# Allegro board E1_BRD_VILLARREAL_HERNANDEZ_707560.brd
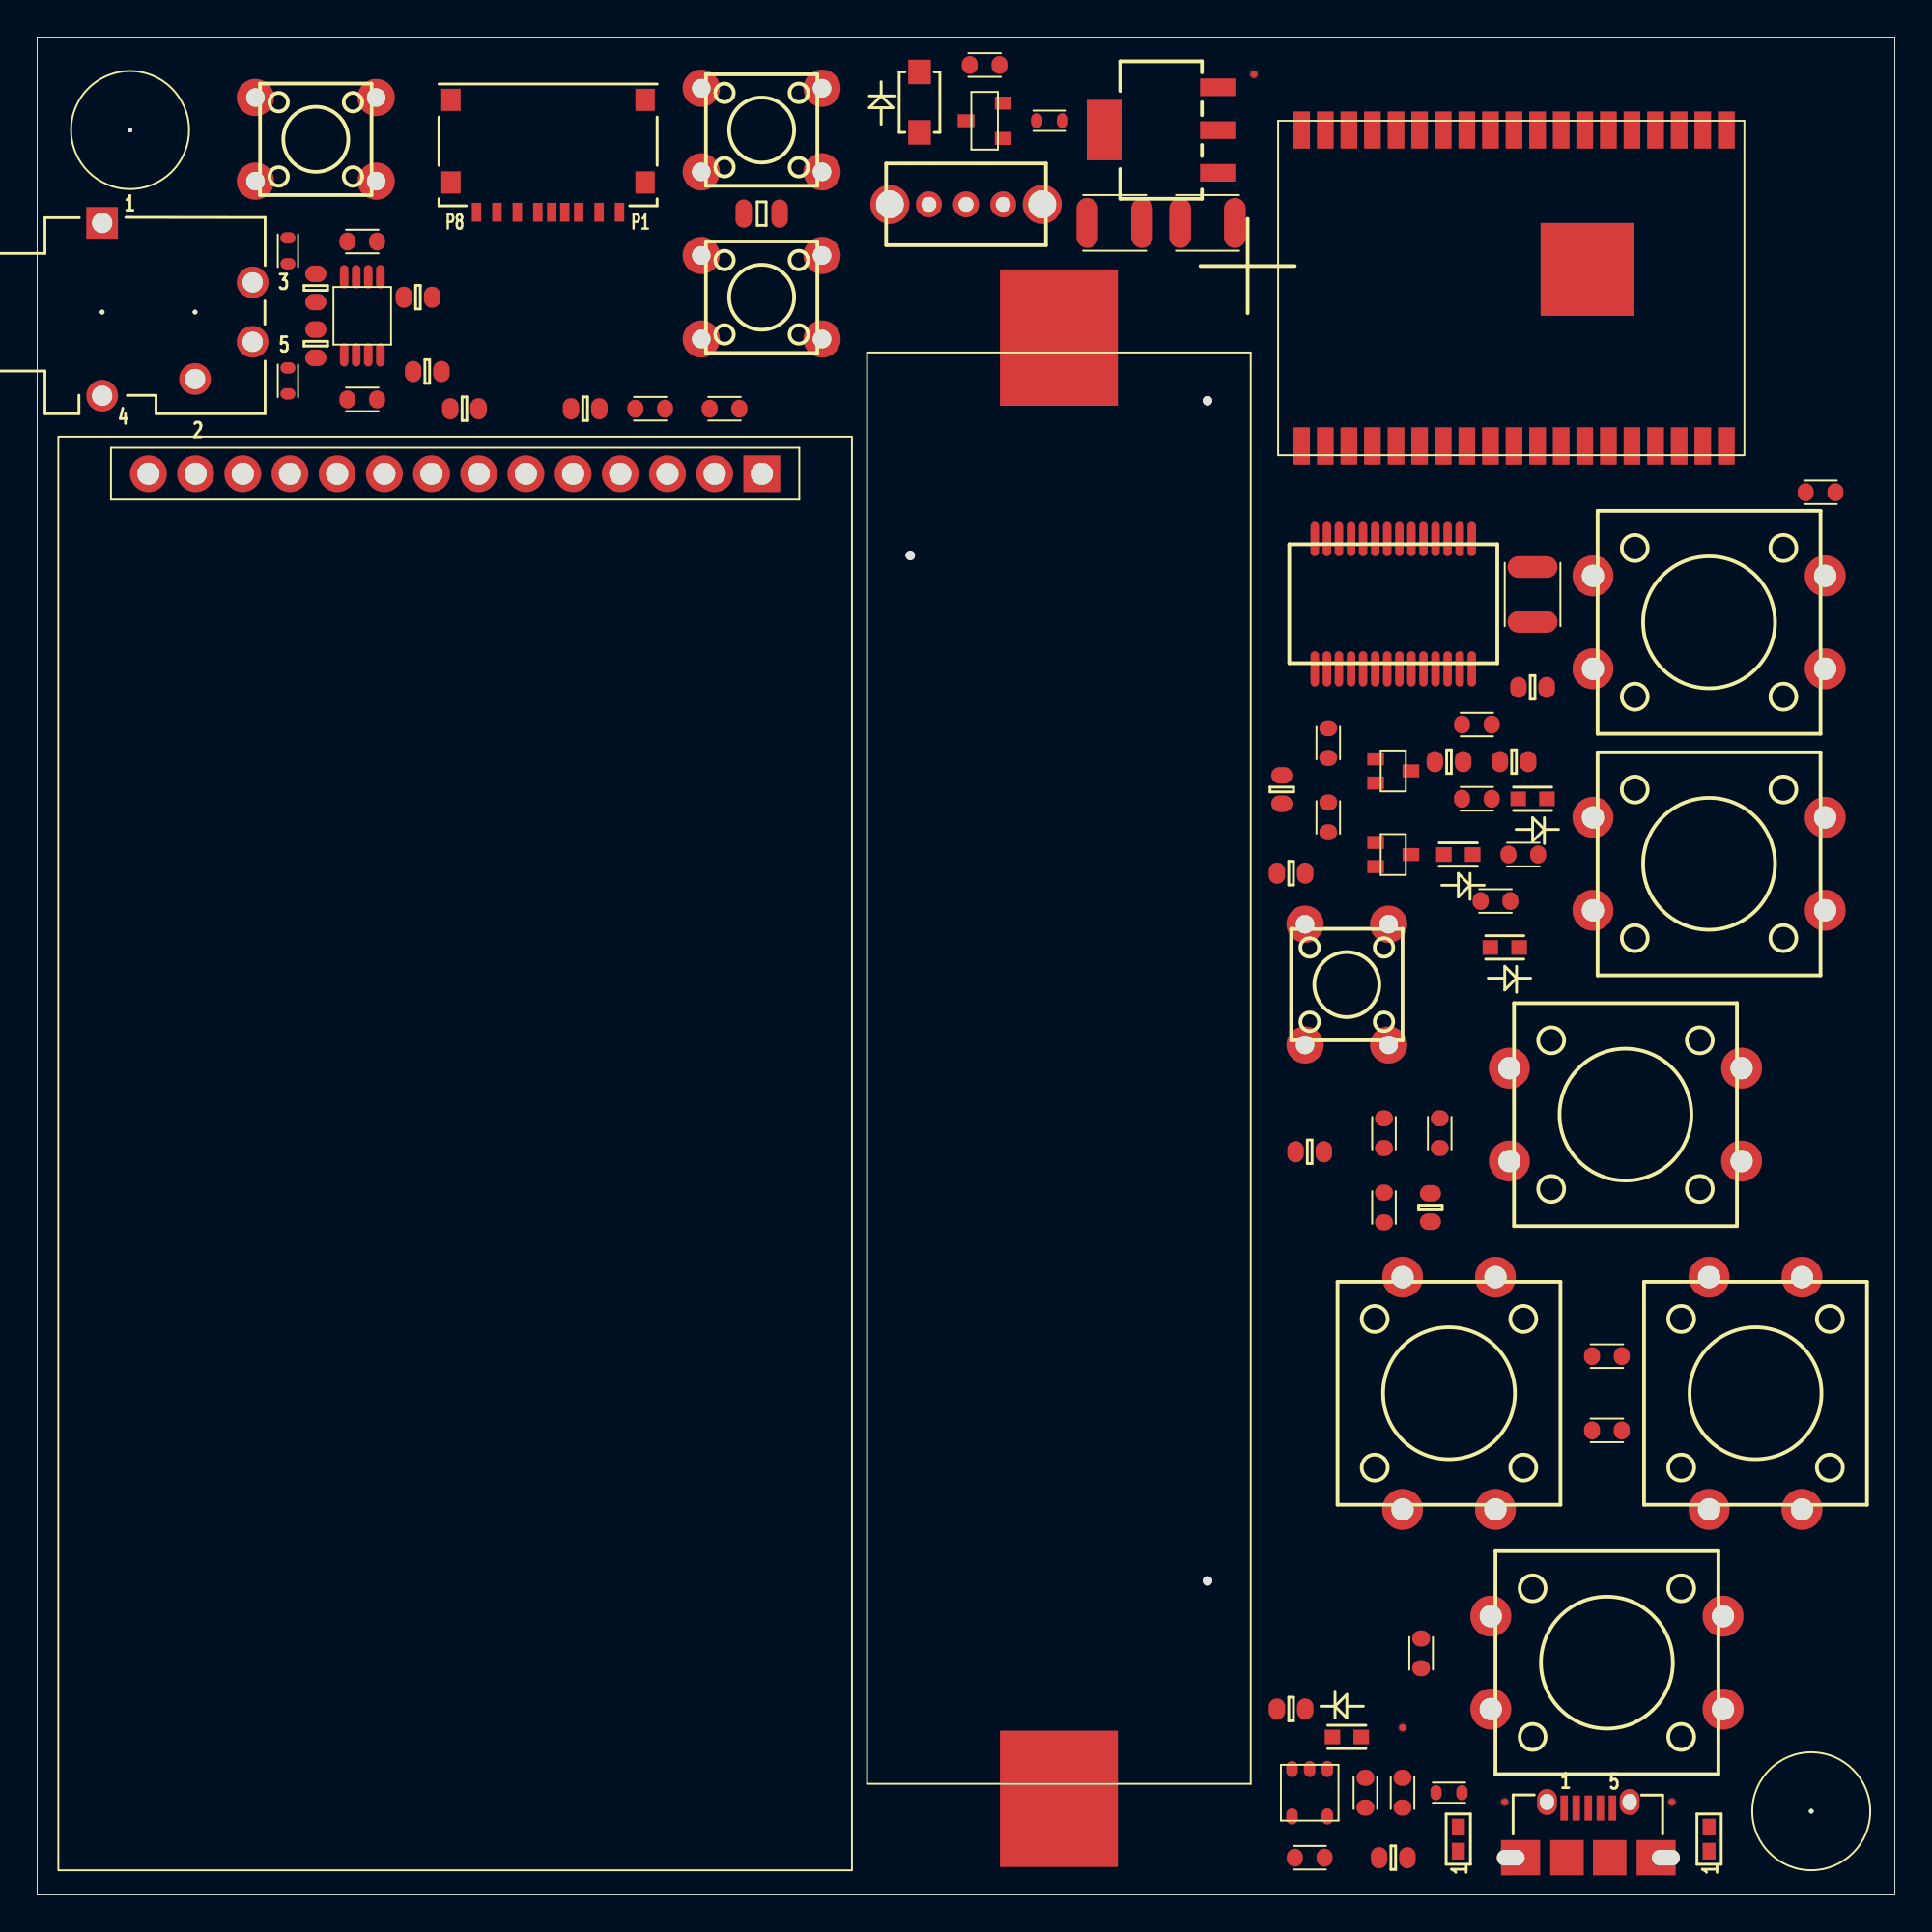
[diagram p0: board, top side]
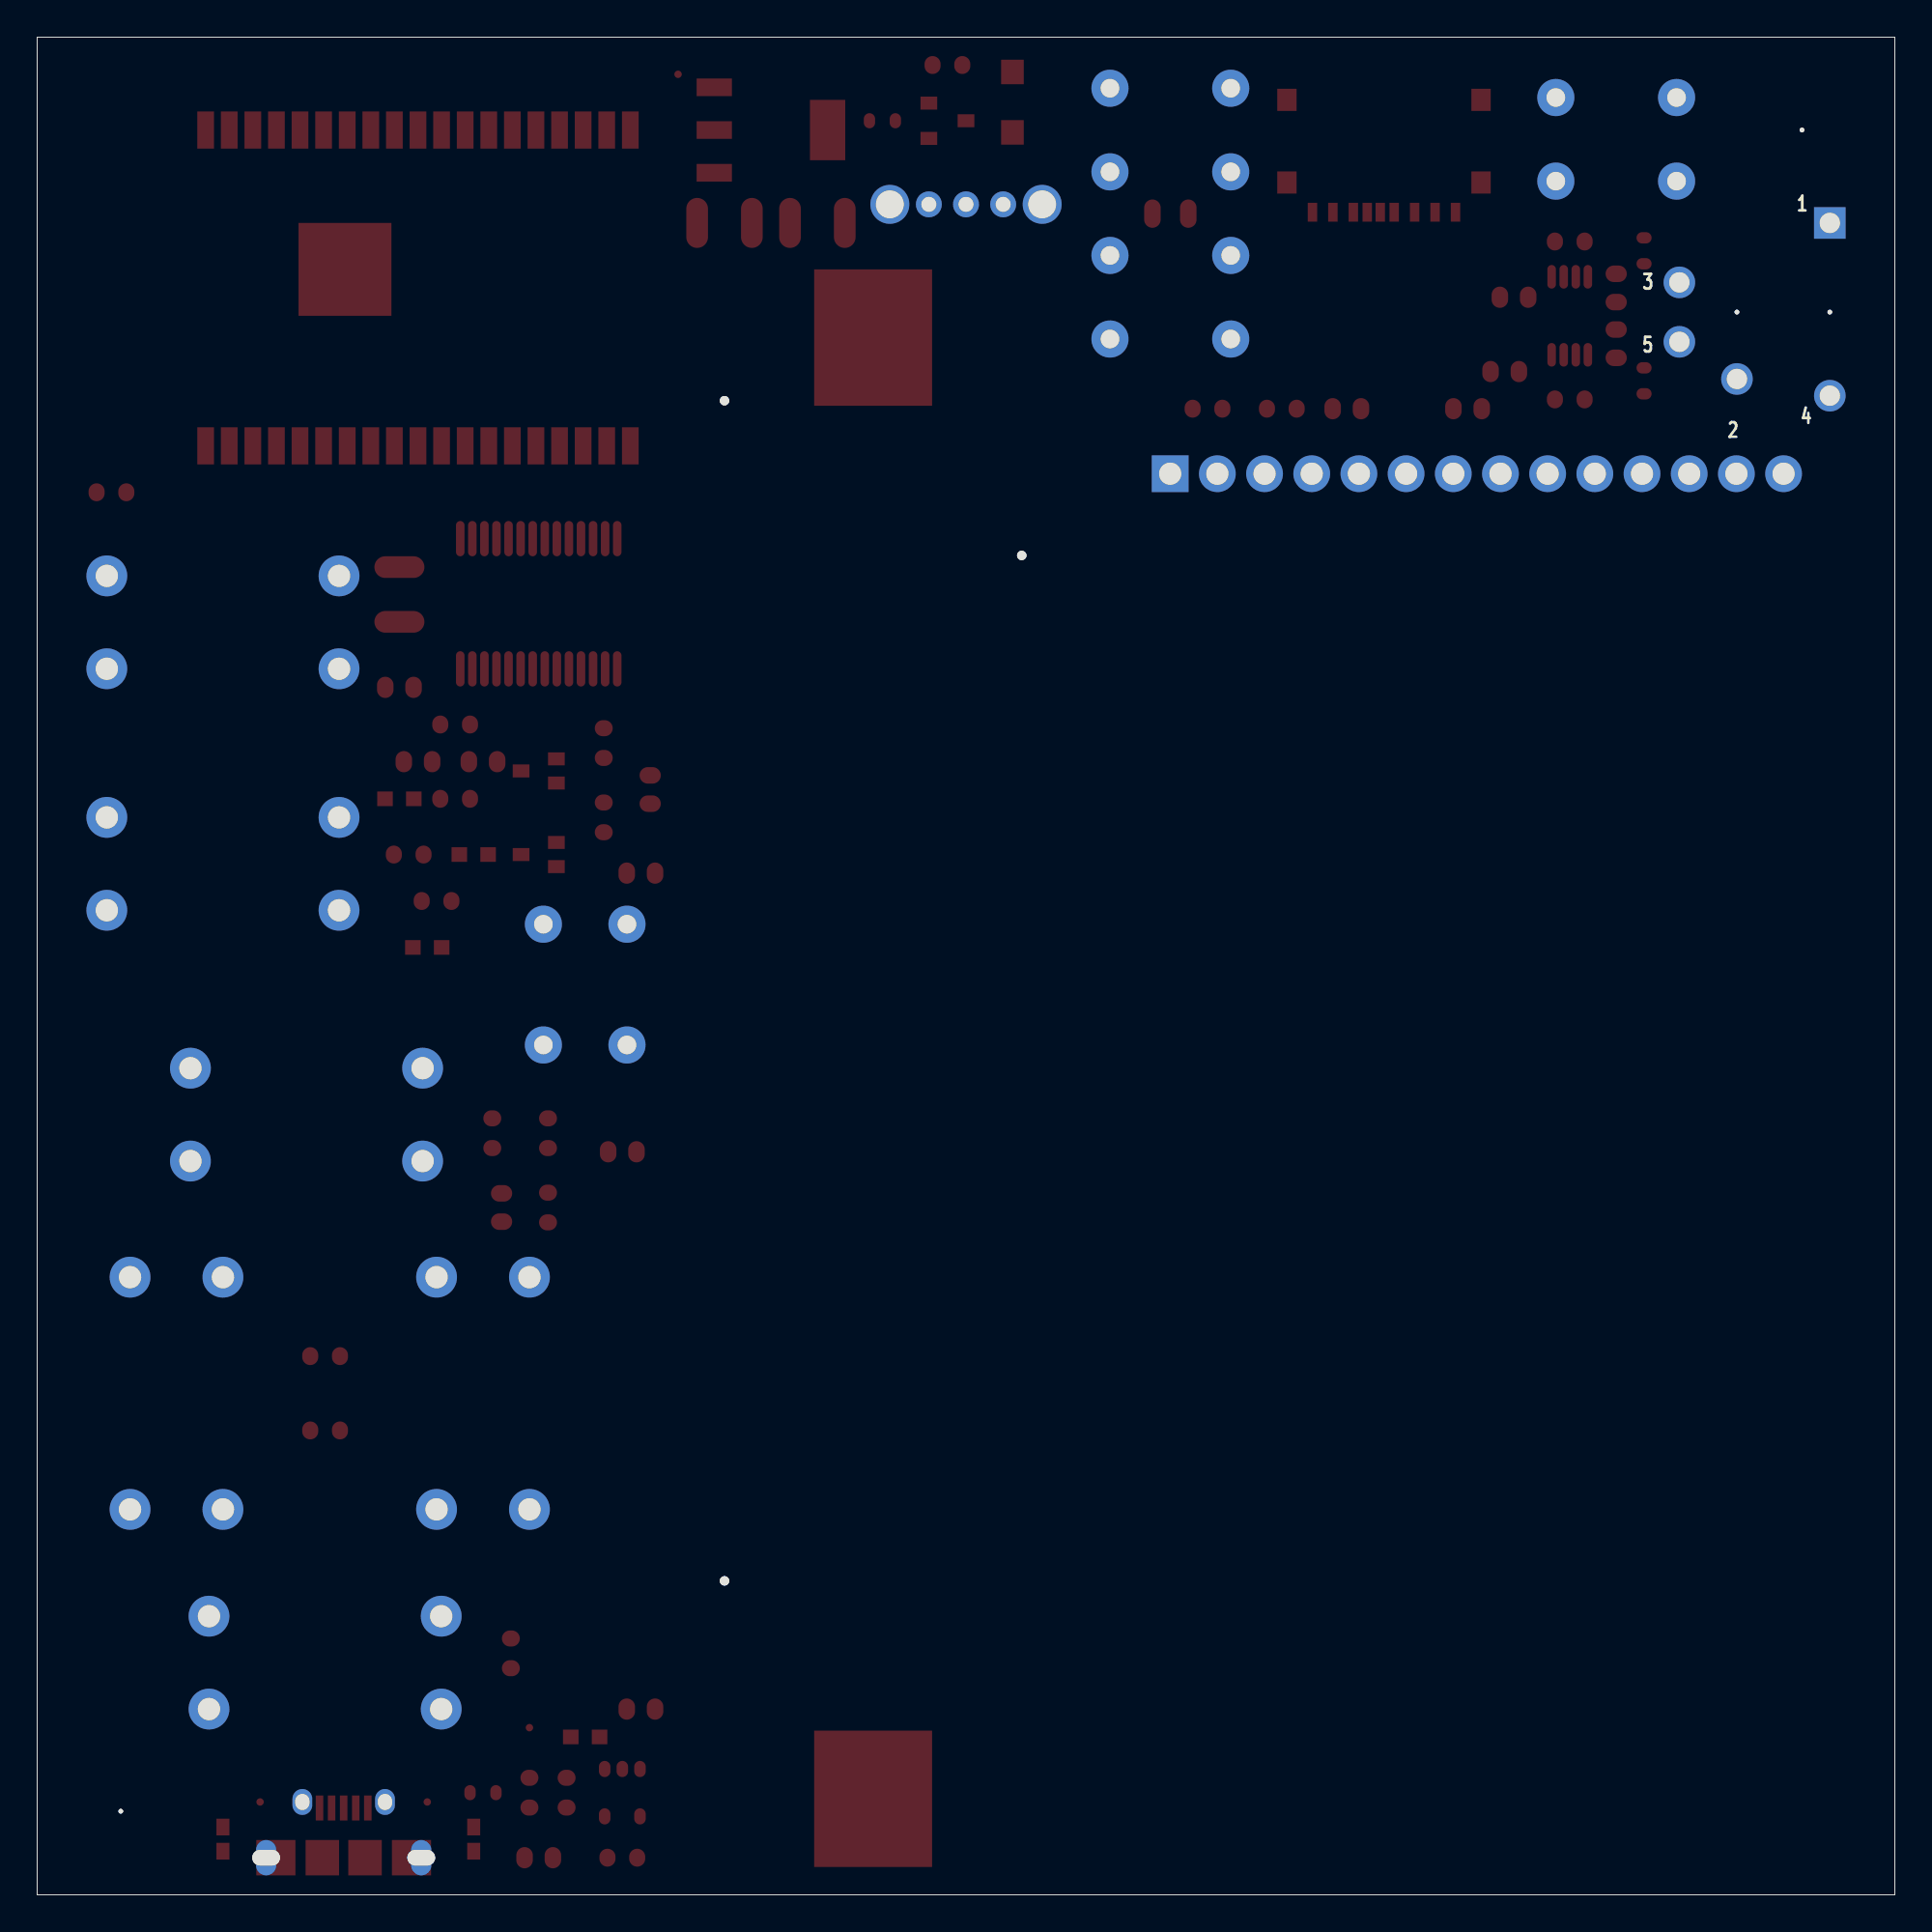
[diagram p1: board, bottom side, seen from below]

Outline 100 x 100 mm; copper layers: TOP, LAYER2, LAYER3, BOTTOM. Coordinates in mm from the lower left corner of the outline.
Outline path: 0,100 0,0 100,0 100,100 0,100

## Design rules (mm)
net group GND: nets GND GND_SHLD
net group USB_D: nets USB_DN USB_DP
net group EC_AUDIO: nets AUDIO_IN+ AUDIO_IN+_R AUDIO_IN- AUDIO_IN-_R AUDIO_OUT+ AUDIO_OUT+_L AUDIO_OUT- AUDIO_OUT-_L
net group EC_MISC: nets CBUS0 CBUS0_LED CBUS1 CBUS1_LED CHG_VIN FT232_RST IO0 IO2 IO4 IO12 IO13 IO14 IO15 IO21 IO25 IO26 IO27 IO32 IO33 IO34 IO34_R IO35 IO35_R IO36 IO39 ISEN_CHRGR LED_VIN RESET STATUS_LED
net group EC_UART: nets DTR_N DTR_N_R RTS_N RTS_N_R UART_RXD UART_TXD
net group MG_SPI: nets SPI_CS0 SPI_CS1 SPI_MISO SPI_MOSI SPI_SCK
net group PWR: nets FT232_P3V3OUT P3V3 P3V7_VBAT P5V0_P3V7 P5V0_P3V7_IN P5V0_P3V7_L P5V0_USB

## Placement (name value [footprint] x y rotation side)
C1  0.1uF  [CC0603_OV]  75 37 90 top
C2  0.1uF  [CC0603_OV]  73 2 0 top
C3  47uF  [CC1210_OV]  58 90 180 top
C4  47uF  [CC1210_OV]  63 90 0 top
C5  4.7uF  [CC0603_OV]  67.5 10 0 top
C6  22uF  [CC1210_OV]  80.5 70 90 top
C7  0.1uF  [CC0603_OV]  80.5 65 0 top
C8  0.1uF  [CC0603_OV]  68.5 40 0 top
C9  0.1uF  [CC0603_OV]  76 61 180 top
C11  4.7uF  [CC0603_OV]  67 59.5 90 top
C12  0.1uF  [CC0603_OV]  79.5 61 0 top
C13  0.1uF  [CC0603_OV]  67.5 55 0 top
C15  10uF  [CC0805_OV]  39 90.5 0 top
C16  0.1uF  [CC0603_OV]  29.5 80 0 top
C18  0.1uF  [CC0603_OV]  21 82 0 top
C19  0.1uF  [CC0603_OV]  20.5 86 0 top
C20  220pF  [CC0603_OV]  15 86.5 90 top
C21  220pF  [CC0603_OV]  15 83.5 270 top
C22  1uF  [CC0603_OV]  23 80 0 top
D1  598-8060-107F  [LED_0603]  70.5 8.5 180 top
D2  MBR120VLSFT1G  [SOD-123]  47.5 96.5 90 top
D3  0402ESDA-MLP1  [0402_MLP]  90 3 90 top
D4  0402ESDA-MLP1  [0402_MLP]  76.5 3 90 top
D5  QTLP603CEBTR  [LED_0603]  80.5 59 0 top
D6  598-8060-107F  [LED_0603]  76.5 56 0 top
D7  598-8060-107F  [LED_0603]  79 51 0 top
J1  47589-0001  [CON5_MICROUSB]  83.5 2 0 top
J2  SJ-43515TS  [CON5_AUD_JACK_RA_TH_SJ-43515TS]  3.5 90 0 top
J4  2.4" 240x320 SPI TFT ILI9341  [TFT_2P4_INCH_14PIN]  22.5 76.5 270 top
J5  1050270001  [CON8_SDCARD_PUSH_SM]  27.5 94.5 0 top
J6  1042P  [1042P_BAT_HLDR]  55 44.5 90 top
L1  330  [L0603_OV]  54.5 95.5 0 top
L2  330  [L0603_OV]  76 5.5 0 top
L3  330  [L0603_OV]  13.5 88.5 90 top
L4  330  [L0603_OV]  13.5 81.5 270 top
NOREF  -  [unnamed]  5 95 0 top
NOREF#2  -  [unnamed]  95.5 4.5 0 top
Q1  SSF1341  [SOT23-3]  51 95.5 180 top
Q2  MMBT3904WT1G  [SOT323]  73 60.5 0 top
Q3  MMBT3904WT1G  [SOT323]  73 56 0 top
R1  200K  [R0603_OV]  68.5 2 0 top
R2  2K  [R0603_OV]  71.5 5.5 90 top
R3  100K  [R0603_OV]  73.5 5.5 90 top
R4  100K  [R0603_OV]  72.5 41 90 top
R5  100K  [R0603_OV]  72.5 37 90 top
R6  100K  [R0603_OV]  51 98.5 180 top
R7  10K  [R0603_OV]  33 80 0 top
R8  10K  [R0603_OV]  69.5 62 270 top
R9  10K  [R0603_OV]  69.5 58 90 top
R10  2K  [R0603_OV]  77.5 59 0 top
R12  470R  [R0603_OV]  80 56 0 top
R13  470R  [R0603_OV]  78.5 53.5 0 top
R14  10K  [R0603_OV]  77.5 63 0 top
R15  100K  [R0603_OV]  17.5 89 180 top
R16  100K  [R0603_OV]  17.5 80.5 180 top
R17  10K  [R0603_OV]  84.5 29 180 top
R18  10K  [R0603_OV]  84.5 25 180 top
R19  10K  [R0603_OV]  74.5 13 270 top
R20  10K  [R0603_OV]  75.5 41 90 top
R21  10K  [R0603_OV]  37 80 0 top
R22  10K  [R0603_OV]  96 75.5 0 top
SW1  OS102011MA1QN1  [SLIDE_SWITCH]  50 91 270 top
SW2  DTS-21N-V  [SWITCH_12X12]  76 27 90 top
SW3  DTS-21N-V  [SWITCH_12X12]  92.5 27 90 top
SW4  DTS-21N-V  [SWITCH_12X12]  84.5 12.5 0 top
SW5  DTS-21N-V  [SWITCH_12X12]  85.5 42 0 top
SW6  PTS645SH432LFS  [SWITCH_6X6]  39 95 0 top
SW7  PTS645SH432LFS  [SWITCH_6X6]  70.5 49 270 top
SW8  PTS645SH432LFS  [SWITCH_6X6]  15 94.5 0 top
SW9  PTS645SH432LFS  [SWITCH_6X6]  39 86 180 top
SW10  DTS-21N-V  [SWITCH_12X12]  90 55.5 0 top
SW11  DTS-21N-V  [SWITCH_12X12]  90 68.5 0 top
TP1  TestPoint 40  [TP]  88 5 0 top
TP2  TestPoint 40  [TP]  79 5 0 top
TP5  TestPoint 40  [TP]  73.5 9 0 top
TP6  TestPoint 40  [TP]  65.5 98 0 top
U4  FT232R  [SSOP28]  73 69.5 270 top
U6  XC6802A42XMR-G  [SOT23-5]  68.5 5.5 270 top
U7  MCP1825ST-3302E/DB  [SOT223-4A]  60.5 95 180 top
U8  ESP32-WROVER-B (16Mb)  [LCC39_WROVERB]  79.5 86.5 270 top
U9  PAM8304ASR  [MSOP8]  17.5 85 270 top

## Library data of the parts
C1 C2 C7-C9 C12 C13 C16 C18 C19 = CAP SMD 0.1uF 16V 10% X7R 0603
C3 C4 = CAP SMD 47uF 16V 20% X5R 1210
C5 C11 = CAP SMD 4.7uF 16V 10% X7S 0603
C6 = CAP SMD 22uF 16V 10% X7R 1210
C15 = CAP SMD 10uF 10V X7R 0805
C20 C21 = CAP SMD 220pF 50V 10% X7R 0603
C22 = CAP SMD 1uF 25V 10% X7R 0603
D1 D6 D7 = LED SMD YLW/GRN 0603
D2 = DIODE MBR120VLSFT1G SOD123
D3 D4 = DIODE TVS BIDIR 0402
D5 = LED SMD BLUE 0603
J1 = CONN Micro USB Type AB
J2 = Audio Jack 3.5mm SJ-43515TS
J4 = TFT 2.4" Wrisky0895
J5 = CON8_SDCARD_SW_0
J6 = 1042P_BATTERY_HOLDER
L1-L4 = IND FER-BEAD 330 1.7A 0603
Q1 = TRANS P-CH 12V 3_3.5A SOT23
Q2 Q3 = TRANS BJT NPN 40V 0_0.2A SOT323
R1 = RES SMD 200K 5% 0_1.1W 0603
R2 R10 = RES SMD 2K 5% 0_0.1W 0603
R3-R6 R15 R16 = RES SMD 100K 5% 0_1.1W 0603
R7-R9 R14 R17-R22 = RES SMD 10K 5% 0_1.25W 0603
R12 R13 = RES SMD 470R 5% 0_0.1W 0603
SW1 = SW OS102011MA1QN1
SW2-SW5 SW10 SW11 = PUSHBUTTON_DTS-21N-V_12X12
SW6-SW9 = PUSHBUTTON_PTS645SH432LFS_6x6
TP1 TP2 TP5 TP6 = TestPoint 40_0
U4 = TMP_0
U6 = XC6802A42XMR-G_0
U7 = MCP1825S
U8 = ESP32_WROVER-B_2
U9 = PAM8304ASR

## Footprints (pads in the part's own frame, mm; a bottom-side part is the same pattern mirrored in y, then rotated)
0402_MLP
  rect 0.9x0.7 smd: 1(-0.65,0) 2(0.65,0)
1042P_BAT_HLDR
  round 0.5 hole 3.45: (-27.6,-8) (27.6,8)
  round 0.5 hole 3: (35.93,-8)
  rect 7.34x6.35 smd: 1(-39.33,0) 2(39.33,0)
CC0603_OV
  oval 0.889x1.143 smd: 1(-0.762,0) 2(0.762,0)
CC0805_OV
  oval 0.889x1.524 smd: 1(-0.965,0) 2(0.965,0)
CC1210_OV
  oval 1.168x2.692 smd: 1(-1.473,0) 2(1.473,0)
CON5_AUD_JACK_RA_TH_SJ-43515TS
  round 0.254 hole 1.092 unplated: (0,-4.8) (5,-4.8)
  rect 1.702x1.702 hole 1.092: 1(0,0)
  round 1.702 hole 1.092: 2(5,-8.4) 3(8.1,-3.2) 4(0,-9.3) 5(8.1,-6.4)
CON5_MICROUSB
  rect 1.803x1.905 smd: (-1.15,0) (1.15,0)
  rect 0.406x1.346 smd: 1(-1.3,2.675) 2(-0.65,2.675) 3(0,2.675) 4(0.65,2.675) 5(1.3,2.675)
  oval 1.067x1.397 hole 0.762x0.864: S1(-2.225,3) S2(2.225,3)
  rect 2.108x1.905 hole 1.499x0.838: S3(-4.175,0) S4(4.175,0)
CON8_SDCARD_PUSH_SM
  rect 0.508x1.016 smd: G1(0.2,-3.925) P1(3.85,-3.925) P2(2.75,-3.925) P3(1.65,-3.925) P4(0.9,-3.925) P5(-0.55,-3.925) P6(-1.65,-3.925) P7(-2.75,-3.925) P8(-3.85,-3.925)
  rect 1.041x1.194 smd: S1(5.225,-2.325) S2(5.225,2.125) S3(-5.225,2.125) S4(-5.225,-2.325)
L0603_OV
  oval 0.61x0.813 smd: 1(-0.698,0) 2(0.698,0)
LCC39_WROVERB
  rect 2x0.9 smd: 1(-8.5,11.43) 2(-8.5,10.16) 3(-8.5,8.89) 4(-8.5,7.62) 5(-8.5,6.35) 6(-8.5,5.08) 7(-8.5,3.81) 8(-8.5,2.54) 9(-8.5,1.27) 10(-8.5,0) 11(-8.5,-1.27) 12(-8.5,-2.54) 13(-8.5,-3.81) 14(-8.5,-5.08) 15(-8.5,-6.35) 16(-8.5,-7.62) 17(-8.5,-8.89) 18(-8.5,-10.16) 19(-8.5,-11.43) 20(8.5,-11.43) 21(8.5,-10.16) 22(8.5,-8.89) 23(8.5,-7.62) 24(8.5,-6.35) 25(8.5,-5.08) 26(8.5,-3.81) 27(8.5,-2.54) 28(8.5,-1.27) 29(8.5,0) 30(8.5,1.27) 31(8.5,2.54) 32(8.5,3.81) 33(8.5,5.08) 34(8.5,6.35) 35(8.5,7.62) 36(8.5,8.89) 37(8.5,10.16) 38(8.5,11.43)
  rect 5x5 smd: 39(-1,3.93)
LED_0603
  rect 0.838x0.787 smd: A(-0.775,0) C(0.775,0)
MSOP8
  oval 1.27x0.46 smd: 1(-2.1,0.975) 2(-2.1,0.325) 3(-2.1,-0.325) 4(-2.1,-0.975) 5(2.1,-0.975) 6(2.1,-0.325) 7(2.1,0.325) 8(2.1,0.975)
R0603_OV
  oval 0.864x0.965 smd: 1(-0.8,0) 2(0.8,0)
SLIDE_SWITCH
  round 1.4 hole 0.8: 1(0,2) 2(0,0) 3(0,-2)
  round 2.1 hole 1.5: MH1(0,4.1) MH2(0,-4.1)
SOD-123
  rect 1.321x1.219 smd: A(-1.626,0) C(1.626,0)
SOT23-3
  rect 0.9x0.7 smd: 1(-1,0.95) 2(-1,-0.95) 3(1,0)
SOT23-5
  oval 0.87x0.62 smd: 1(-1.275,0.95) 2(-1.275,0) 3(-1.275,-0.95) 4(1.275,-0.95) 5(1.275,0.95)
SOT223-4A
  rect 1.9x0.95 smd: 1(-3.05,2.3) 2(-3.05,0) 3(-3.05,-2.3)
  rect 1.9x3.25 smd: 4(3.05,0)
SOT323
  rect 0.9x0.7 smd: 1(-0.95,0.65) 2(-0.95,-0.65) 3(0.95,0)
SSOP28
  oval 1.9x0.46 smd: 1(-3.505,4.225) 2(-3.505,3.575) 3(-3.505,2.925) 4(-3.505,2.275) 5(-3.505,1.625) 6(-3.505,0.975) 7(-3.505,0.325) 8(-3.505,-0.325) 9(-3.505,-0.975) 10(-3.505,-1.625) 11(-3.505,-2.275) 12(-3.505,-2.925) 13(-3.505,-3.575) 14(-3.505,-4.225) 15(3.505,-4.225) 16(3.505,-3.575) 17(3.505,-2.925) 18(3.505,-2.275) 19(3.505,-1.625) 20(3.505,-0.975) 21(3.505,-0.325) 22(3.505,0.325) 23(3.505,0.975) 24(3.505,1.625) 25(3.505,2.275) 26(3.505,2.925) 27(3.505,3.575) 28(3.505,4.225)
SWITCH_6X6
  round 2 hole 1: 1(-3.25,2.25) 2(3.25,2.25) 3(-3.25,-2.25) 4(3.25,-2.25)
SWITCH_12X12
  round 2.2 hole 1.2: 1(-6.25,2.5) 2(6.25,2.5) 3(-6.25,-2.5) 4(6.25,-2.5)
TFT_2P4_INCH_14PIN
  rect 1.981x1.981 hole 1.194: 1(0,16.51)
  round 1.981 hole 1.194: 2(0,13.97) 3(0,11.43) 4(0,8.89) 5(0,6.35) 6(0,3.81) 7(0,1.27) 8(0,-1.27) 9(0,-3.81) 10(0,-6.35) 11(0,-8.89) 12(0,-11.43) 13(0,-13.97) 14(0,-16.51)
TP
  round 0.4 smd: 1(0,0)
unnamed
  round 0.254 hole 3.175 unplated: (0,0)

## Nets
GND: C1.1 C2.1 C3.1 C4.1 C5.1 C6.1 C7.1 C8.1 C9.1 C11.1 C12.1 C13.2 C15.1 C16.1 C20.1 C21.1 C22.1 D3.1 D4.1 D5.C(CATHODE) J1.5 J2.4 J4.2 J5.G1 J5.P6(VSS) J5.S1 J5.S2 J5.S3 J5.S4 J6.1(-) L2.1 R1.1 R5.1 R6.1 R17.1 R19.1 SW1.MH1 SW1.MH2 SW6.3 SW7.3 SW8.3 SW9.3 SW10.3 SW11.3 TP1.1(PIN1) U4.7 U4.18 U4.21 U4.25 U4.26 U6.2 U7.2 U7.4 U8.1 U8.15 U8.38 U8.39 U9.7
GND_SHLD: J1.S1 J1.S2 J1.S3 J1.S4(SHLD4) L2.2
P3V3: C4.2 C6.2 C7.2 C15.2 C16.2 C22.2 J4.1(VCC) J5.P4 R7.2 R21.2 R22.2 SW2.1 SW3.1 SW4.1 SW5.1 TP6.1(PIN1) U4.4(VCCIO) U7.3(VOUT) U8.2 U9.2 U9.3
P3V7_VBAT: C2.2 J6.2 Q1.3 R4.2 TP5.1(PIN1) U6.3
P5V0_P3V7: D2.C Q1.2(S) SW1.2
P5V0_P3V7_IN: C3.2 L1.2 U7.1
P5V0_P3V7_L: L1.1 SW1.1
P5V0_USB: C5.2 C11.2 C12.2 D2.A D6.A D7.A J1.1 Q1.1 R2.1 R3.1 R6.2 R14.2 TP2.1(PIN1) U4.20 U6.4
AUDIO_IN+: R16.2 U9.5
AUDIO_IN+_R: C18.2 R16.1
AUDIO_IN-: R15.2 U9.4
AUDIO_IN-_R: C19.2 R15.1
AUDIO_OUT+: C20.2 J2.3 L3.1
AUDIO_OUT+_L: L3.2 U9.1
AUDIO_OUT-: C21.2 J2.2 L4.1
AUDIO_OUT-_L: L4.2 U9.8
CBUS0: R13.2 U4.23
CBUS0_LED: D7.C(CATHODE) R13.1
CBUS1: R12.2 U4.22
CBUS1_LED: D6.C(CATHODE) R12.1
CHG_VIN: D1.C(CATHODE) R3.2 U6.1(\C\H\G)
DTR_N: Q3.2(E) R8.2 U4.2
DTR_N_R: Q2.1 R8.1
FT232_P3V3OUT: C13.1 U4.17
FT232_RST: R14.1 U4.19
IO0: Q3.3 R22.1 SW7.1 U8.25
IO2: R10.1 U8.24
IO4: U8.26
IO12: U8.14
IO13: SW6.1 U8.16
IO14: J4.8 U8.13
IO15: U8.23
IO21: J4.5 U8.33
IO25: C19.1 U8.10 U9.6(\S\D)
IO26: C18.1 U8.11
IO27: SW8.1 U8.12
IO32: SW11.1 U8.8
IO33: SW10.1 U8.9
IO34: R19.2 R20.2 SW4.3 U8.6
IO34_R: R20.1 SW5.3
IO35: R17.2 R18.2 SW2.3 U8.7
IO35_R: R18.1 SW3.3
IO36: C1.2 C8.2 R4.1 R5.2 U8.4
IO39: R21.1 SW9.1 U8.5
ISEN_CHRGR: R1.2 U6.5
LED_VIN: D1.A R2.2
RESET: C9.2 J4.4 Q2.3 R7.1 U8.3
RTS_N: Q2.2(E) R9.2 U4.3
RTS_N_R: Q3.1 R9.1
SPI_CS0: J4.3 U8.29
SPI_CS1: J5.P2 U8.36
SPI_MISO: J5.P7 U8.31
SPI_MOSI: J4.6 J5.P3 U8.37
SPI_SCK: J4.7 J5.P5 U8.30
STATUS_LED: D5.A R10.2
UART_RXD: U4.1 U8.34
UART_TXD: U4.5 U8.35(TXD0)
USB_DN: D4.2(A2) J1.2 U4.16
USB_DP: D3.2(A2) J1.3 U4.15

Pads without a net: J1 4; J2 1 5; J4 9 10 11 12 13 14; J5 P1 P8; SW1 3; SW2 2 4; SW3 2 4; SW4 2 4; SW5 2 4; SW6 2 4; SW7 2 4; SW8 2 4; SW9 2 4; SW10 2 4; SW11 2 4; U4 6 8 9 10 11 12 13 14 24 27 28; U8 17 18 19 20 21 22 27 28 32
